# Altium PCB Receiver.PcbDoc
Units mil, origin at the board's own origin, x right, y up, seen from the top; angles counter-clockwise.
Board outline 6000 x 4000 mil, 2 copper layers (Top Layer, Bottom Layer); 6 components, 8 nets, 43 pads, 0 vias.
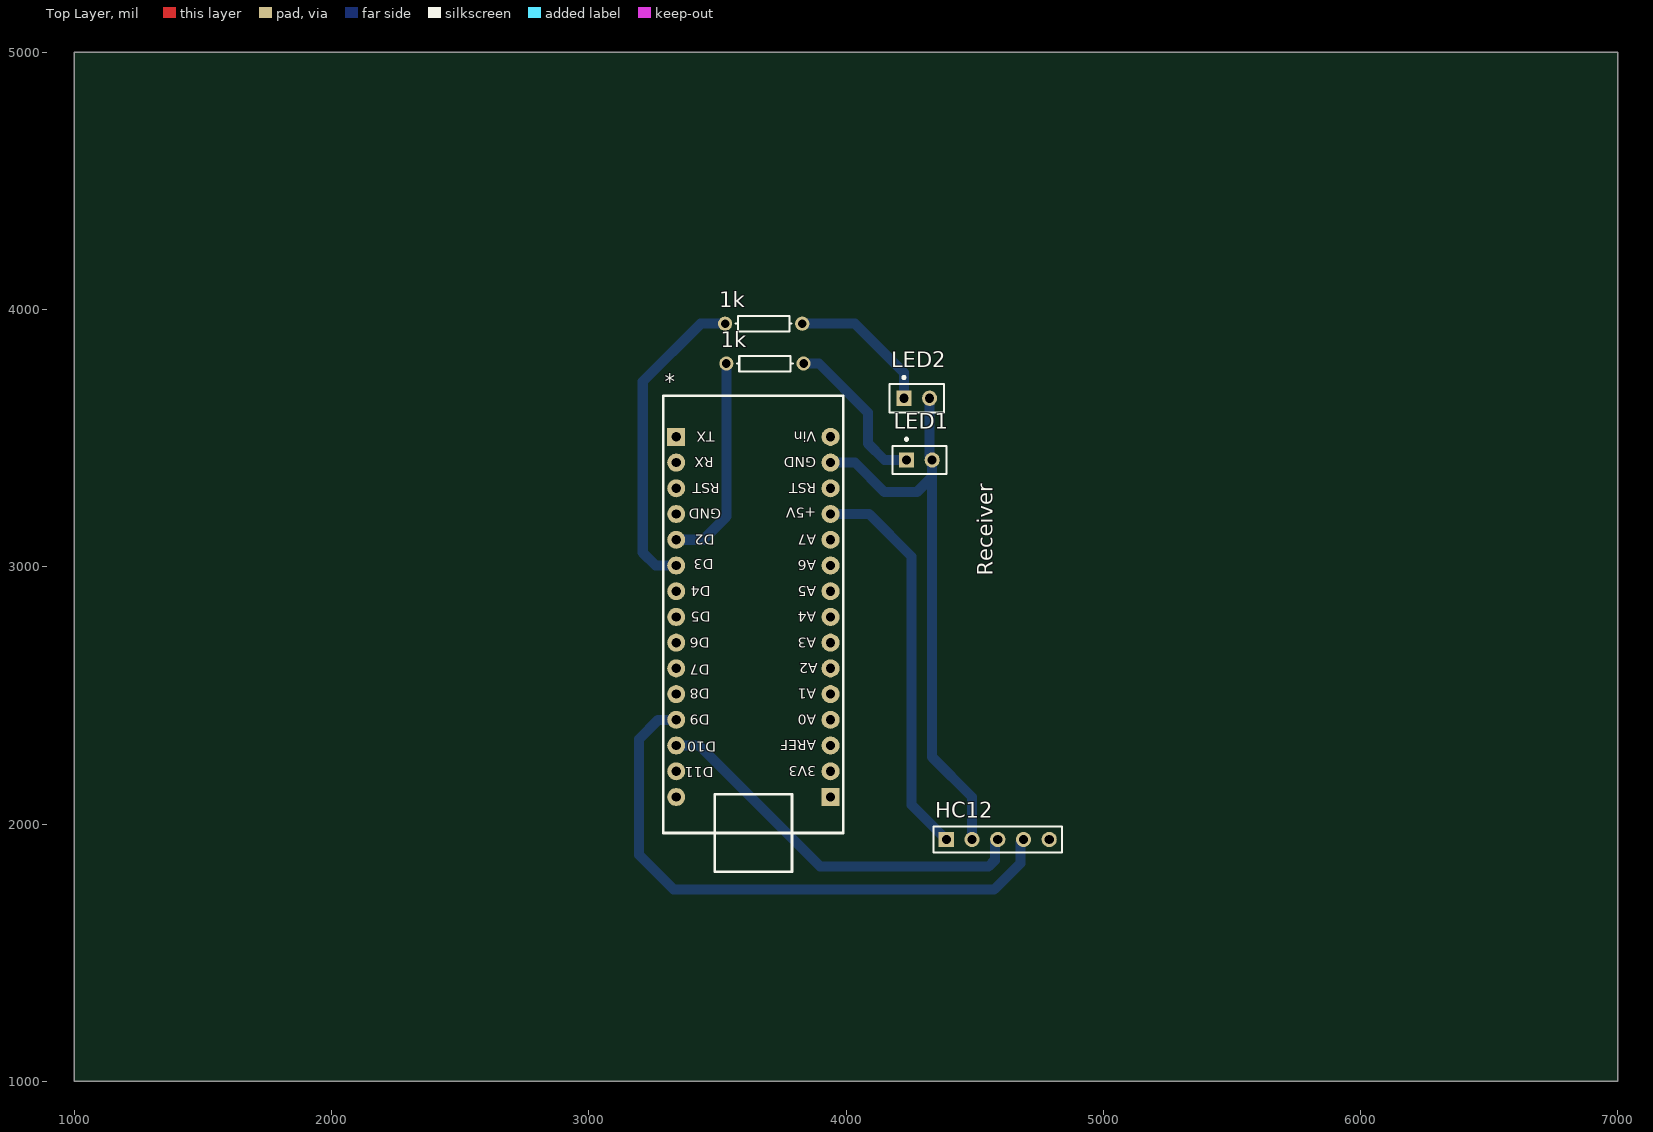
[diagram p0: Top Layer view]
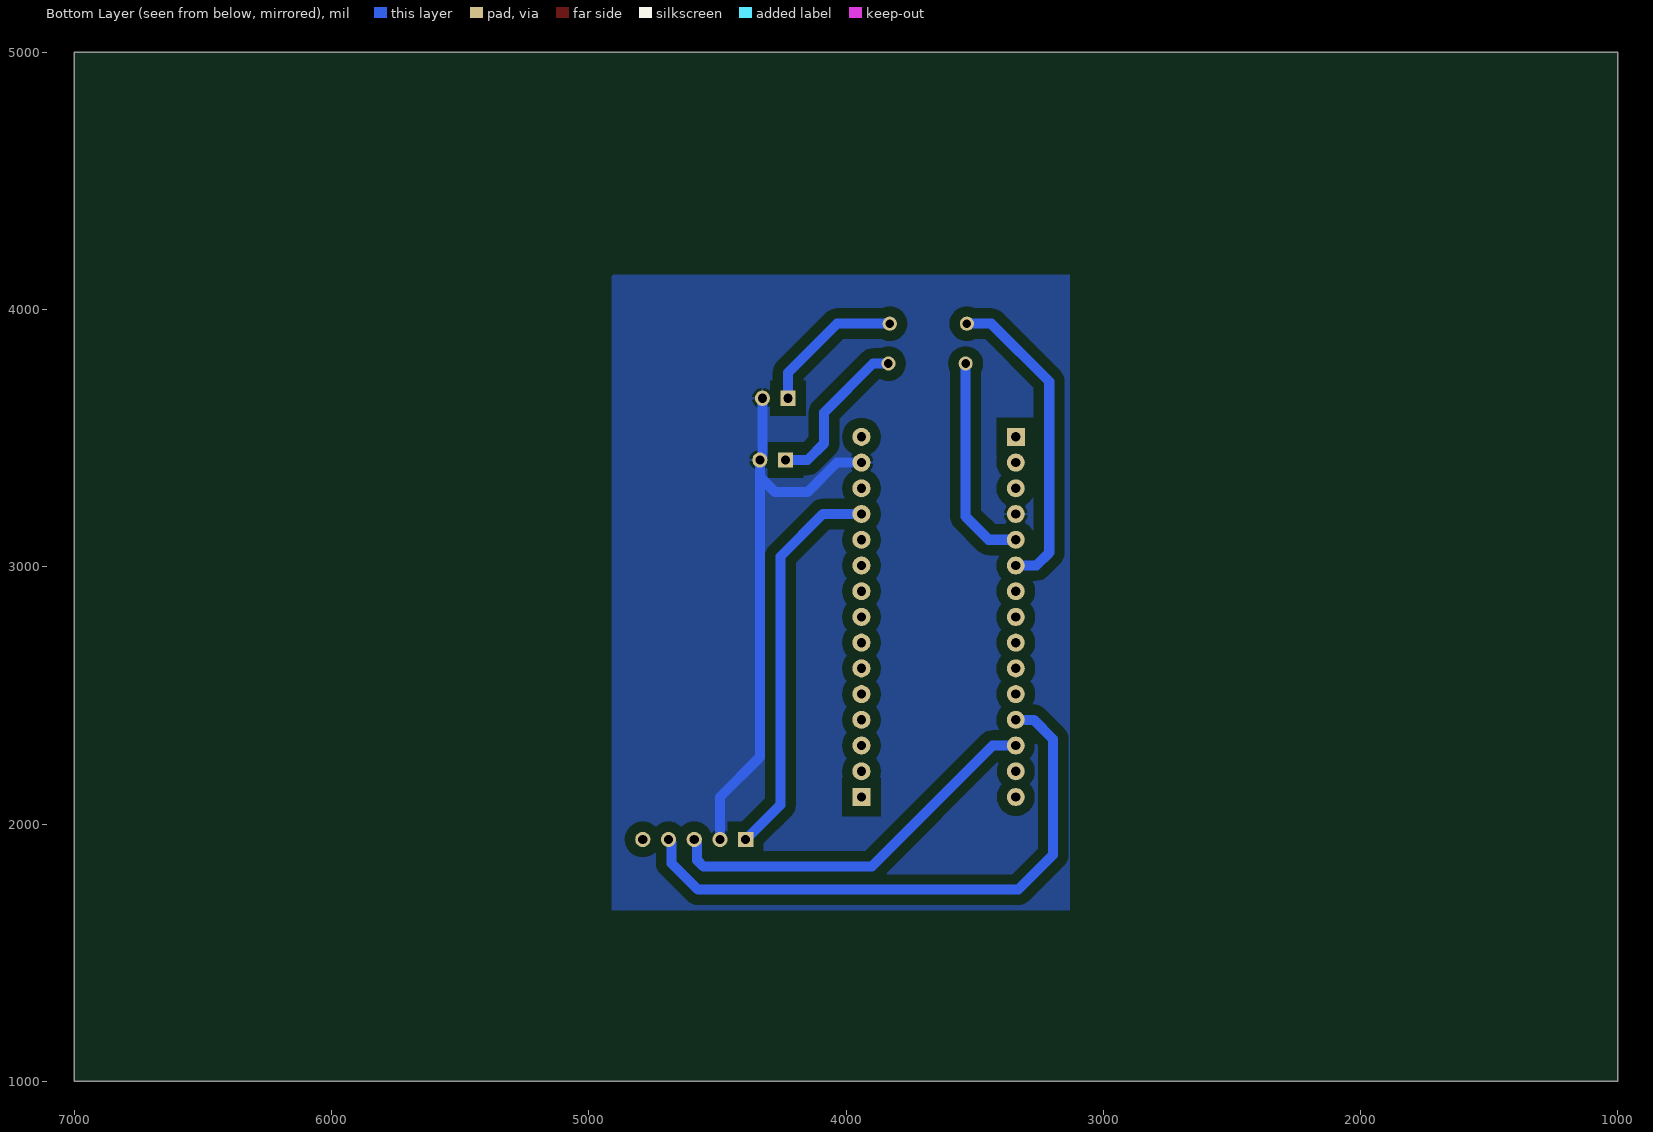
[diagram p1: Bottom Layer view, seen from below]

## Layer stack, top to bottom
Top Solder: solder mask 0.4, Solder Resist, Dk 3.5
Top Layer: signal copper 1.4
Dielectric 1: dielectric 12.6, FR-4, Dk 4.8
Bottom Layer: signal copper 1.4
Bottom Solder: solder mask 0.4, Solder Resist, Dk 3.5

## Board outline
1000,1000 7000,1000 7000,5000 1000,5000

## Design rules (kind name [scope] priority, off if disabled: settings)
Clearance [All] p1: gap=39.37
PolygonConnect [All] p1: connectstyle=Relief reliefconductorwidth=10 reliefentries=4 polygonreliefangle="90 Angle" airgapwidth=10
RoomDefinition Receiver [InComponentClass('Receiver')] p1: confinementstyle=ConfineIn formatcopy=TRUE lockcomponents=FALSE outline 3130,1665 4910,1665 4910,4135 3130,4135
RoutingVias [All] p1: holewidth=28 width=50 viastyle="Through Hole" minholewidth=28 minwidth=50 maxholewidth=28 maxwidth=50
SolderMaskExpansion [All] p1: expansion=4
UnpouredPolygon [All] p1: allowunpoured=FALSE
Width [All] p1: maxlimit=39.37 minlimit=39.37 preferedwidth=39.37
29 further rules are at their usual default settings.

## Classes and differential pairs
component class Receiver: 1k * HC12 LED1 LED2

## Components (designator, comment, footprint, x,y, rotation, side; value= is the part's Value field where it differs from the comment)
1k "Res1" AXIAL-0.3 3680,3945 r0 top (schematic designator R?)
1k "Res1" AXIAL-0.3 3685,3790 r0 top (schematic designator R?)
* "Nano" ArduinoNano 3940,2205 r90 top
HC12 "Header 5" HDR1X5 4390,1940 r0 top
LED1 "Lamp" PIN2 4235,3415 r0 top
LED2 "Lamp" PIN2 4225,3655 r0 top

## Footprints (in the part's own frame and the unit in brackets; to place one, negate y for a bottom-side part, rotate by r counter-clockwise, add the part's x,y. Pads: shape width x height; smd on the part's side, far side on the other; paste and mask are expansions set on the pad)
ArduinoNano [mil]
  rect 70x70 hole 36: 0(-100,0) 15(1300,600)
  round 70 hole 36: 1(0,0) 2(100,0) 3(200,0) 4(300,0) 5(400,0) 6(500,0) 7(600,0) 8(700,0) 9(800,0) 10(900,0) 11(1000,0) 12(1100,0) 13(1200,0) 14(1300,0) 16(1200,600) 17(1100,600) 18(1000,600) 19(900,600) 20(800,600) 21(700,600) 22(600,600) 23(500,600) 24(400,600) 25(300,600) 26(200,600) 27(100,600) 28(0,600) 29(-100,600)
  silkscreen extent -390,-50 1460,650
AXIAL-0.3 [mm] "Axial Device, Thru-Hole; 2 Leads; 0.3 in Pin Spacing"
  round 1.4 hole 0.85: 1(-3.81,0) 2(3.81,0)
  silkscreen extent -2.77,-0.76 2.77,0.76
HDR1X5 [mm] "Connector; Header; 5 Position"
  rect 1.5x1.5 hole 0.9: 1(0,0)
  round 1.5 hole 0.9: 2(2.54,0) 3(5.08,0) 4(7.62,0) 5(10.16,0)
  silkscreen extent -1.27,-1.27 11.43,1.27
PIN2 [mm] "Photosensitive Diode; 2 Leads"
  rect 1.5x1.5 hole 0.9: 1(0,0)
  round 1.5 hole 0.9: 2(2.54,0)
  silkscreen extent -1.4,-1.4 3.94,2.17

## Part data
1k 1k: "Resistor"
*: library part Component_1
HC12: "Header, 5-Pin"
LED1 LED2: "Incandescent Bulb"

## Nets (pads, with @x,y where several pads share a name; then routed paths per layer and width w, separated by ;. In a path a pad name is that pad's centre, name@x,y a point inside that pad or via, vN(x,y) a via of type N, cw(c..) or ccw(c..) an arc to the next point about the centre after c; other vN are vias at no path point)
D2: 1k.1@3535,3790 *.19 | length 827.3
  Bottom Layer w39.37: *.19 3445,3105 3535,3195 1k.1@3535,3790
D4: 1k.1@3530,3945 *.20 | length 1228.9
  Bottom Layer w39.37: *.20 3260,3005 3210,3055 3210,3720 3435,3945 1k.1@3530,3945
GND: *.13 *.18 HC12.2 LED1.2 LED2.2 | length 2236.7
  Bottom Layer w39.37: *.13 4035,3405 4150,3290 4275,3290 4335,3350 ; LED1.2@4325,3425 LED2.2 ; LED1.2 4335,3350 ; HC12.2 4490,2105 4335,2260 4335,3350
NetLED1_1: 1k.2@3835,3790 LED1.1 | length 625.6
  Bottom Layer w39.37: 1k.2@3835,3790 3895,3790 4085,3600 4085,3480 4150,3415 LED1.1
NetLED2_1: 1k.2@3830,3945 LED2.1 | length 573.7
  Bottom Layer w39.37: 1k.2@3830,3945 4035,3945 4225,3755 LED2.1
RX: *.27 HC12.3 | length 1528.9
  Bottom Layer w39.37: *.27 3430,2305 3900,1835 4554.6,1835 4578.58,1858.99 4578.58,1928.58 HC12.3
TX: *.26 HC12.4 | length 2305.2
  Bottom Layer w39.37: *.26 3270,2405 3195,2330 3195,1880 3330,1745 4575.95,1745 4678.58,1847.63 4678.58,1928.58 HC12.4
VCC: *.11 HC12.1 | length 1539.3
  Bottom Layer w39.37: *.11 4090,3205 4255,3040 4255,2075 HC12.1
pads on no net: *.0 *.1 *.2 *.3 *.4 *.5 *.6 *.7 *.8 *.9 *.10 *.12 *.14 *.15 *.16 *.17 *.21 *.22 *.23 *.24 *.25 *.28 *.29 HC12.5

## Polygon pours and split planes (outlines as drawn)
GND on Bottom Layer "Bottom Layer-No Net" (solid, pour order 2): 3130,4135 3130,1665 4910,1665 4910,4130 4905,4135 3130,4135

## Silkscreen, mask and mechanical layers (free items; w line width, h text height)
Top Overlay:
  text "Receiver" at 4570,2965 h60 r90

## Text inside footprints (layer, text, board x,y; h text height)
*: Top Overlay "D11" at 3485,2220 h40 r180; Top Overlay "D10" at 3495,2320 h40 r180; Top Overlay "D9" at 3470,2425 h40 r180; Top Overlay "D8" at 3470,2525 h40 r180; Top Overlay "D7" at 3470,2620 h40 r180; Top Overlay "D6" at 3470,2725 h40 r180; Top Overlay "D5" at 3475,2825 h40 r180; Top Overlay "D4" at 3475,2925 h40 r180; Top Overlay "D3" at 3485,3030 h40 r180; Top Overlay "D2" at 3490,3125 h40 r180; Top Overlay "GND" at 3515,3225 h40 r180; Top Overlay "RST" at 3510,3325 h40 r180; Top Overlay "RX" at 3485,3425 h40 r180; Top Overlay "TX" at 3490,3525 h40 r180; Top Overlay "Vin" at 3885,3525 h40 r180; Top Overlay "GND" at 3885,3425 h40 r180; Top Overlay "RST" at 3885,3325 h40 r180; Top Overlay "+5V" at 3885,3230 h40 r180; Top Overlay "A7" at 3885,3125 h40 r180; Top Overlay "A6" at 3885,3025 h40 r180; Top Overlay "A5" at 3885,2925 h40 r180; Top Overlay "A4" at 3885,2825 h40 r180; Top Overlay "A3" at 3885,2725 h40 r180; Top Overlay "A2" at 3890,2625 h40 r180; Top Overlay "A1" at 3885,2525 h40 r180; Top Overlay "A0" at 3885,2425 h40 r180; Top Overlay "AREF" at 3885,2325 h40 r180; Top Overlay "3V3" at 3885,2225 h40 r180